# EAGLE board Placa_intermediária (EAGLE 9.5.1)
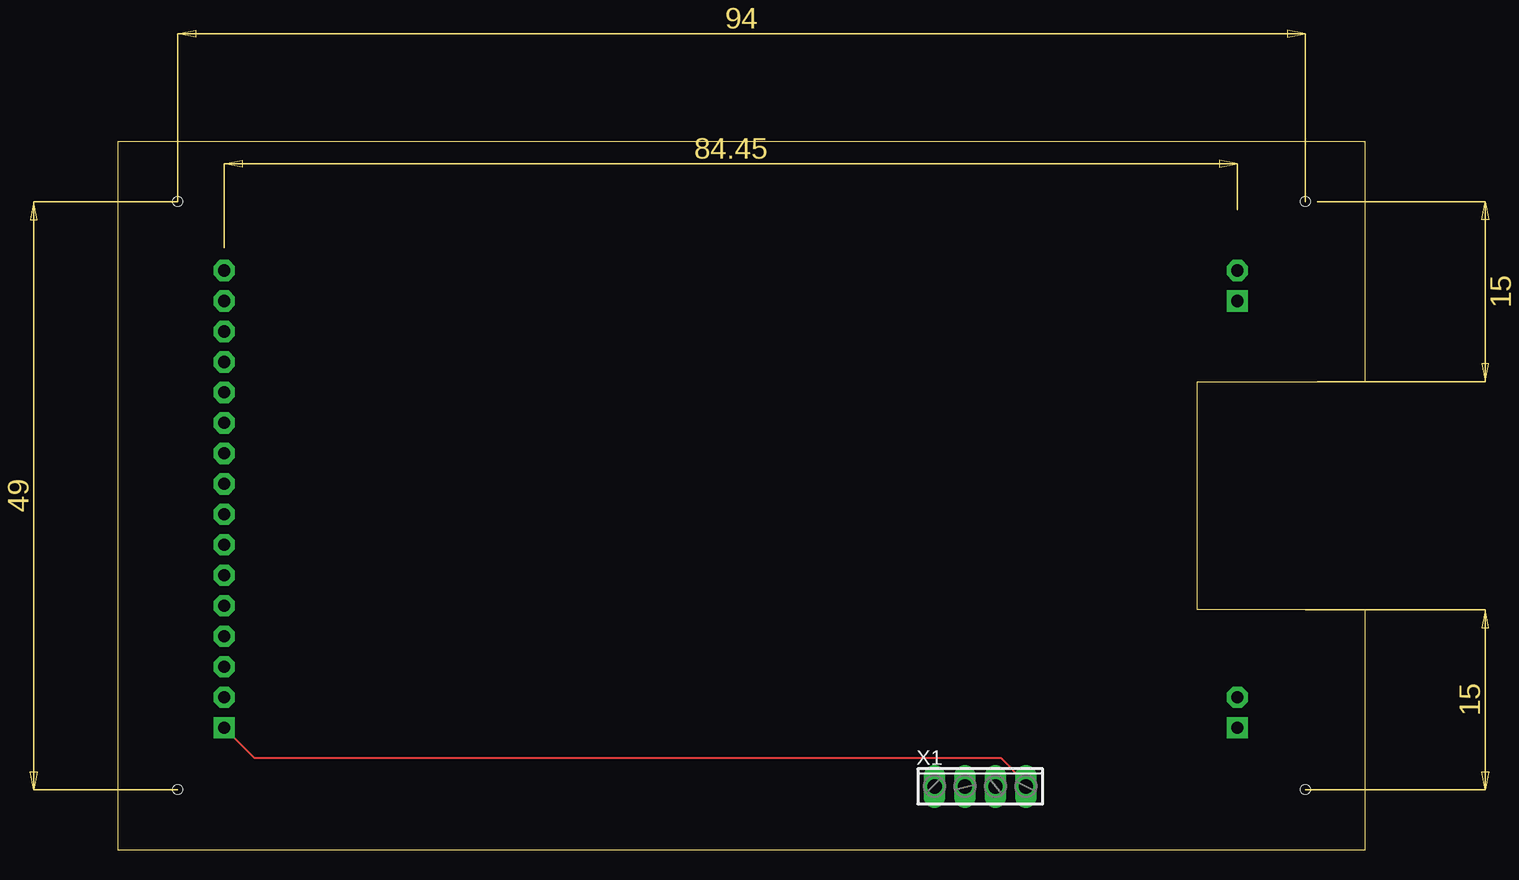
[diagram p0: board, top side]
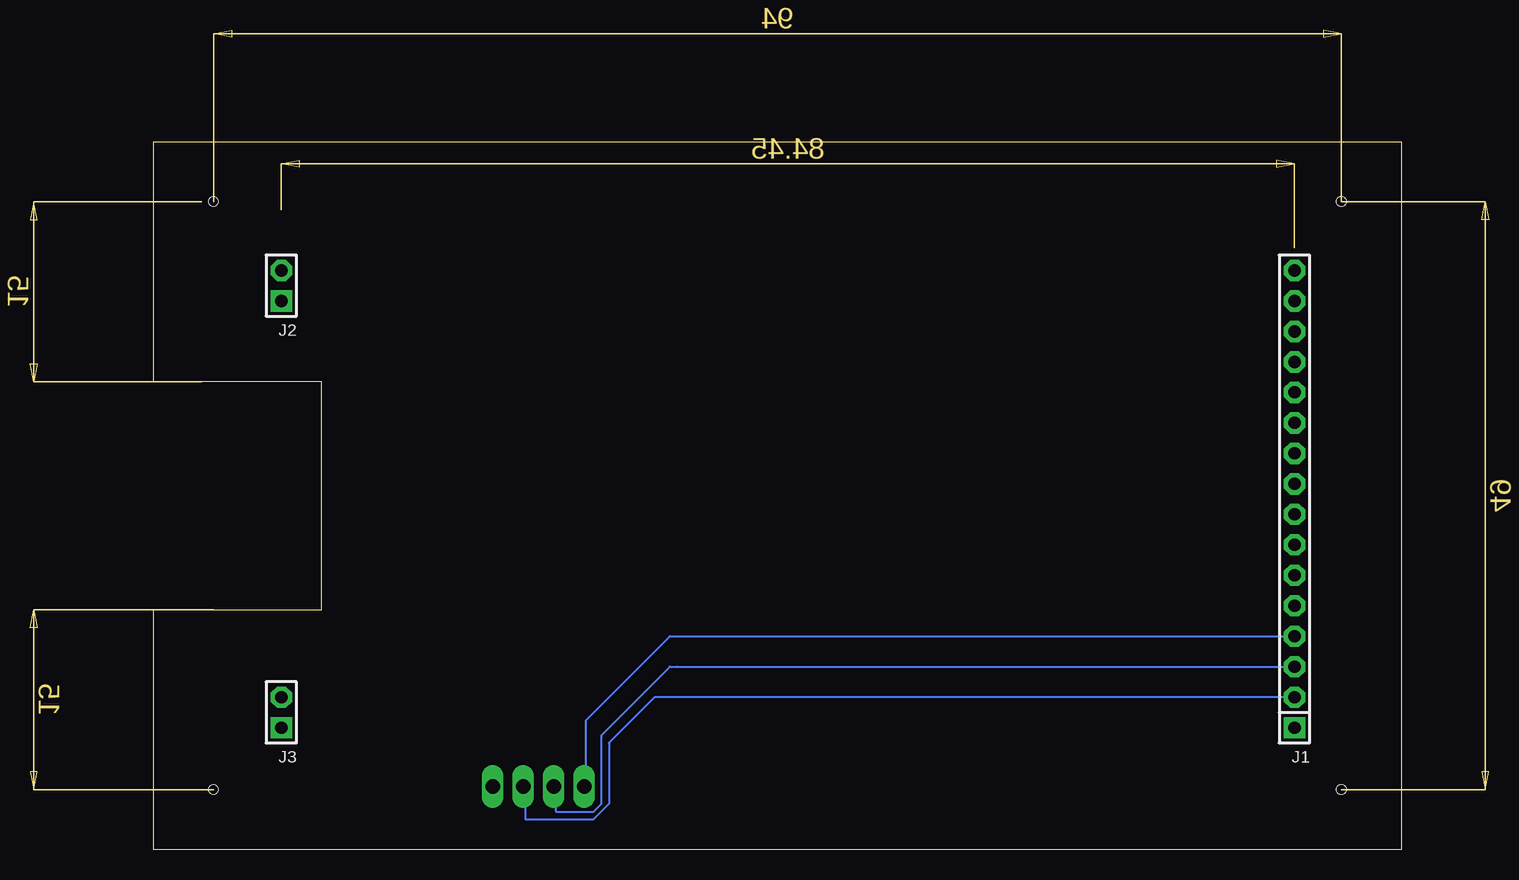
[diagram p1: board, bottom side, seen from below]

Size 104 x 59 mm. Coordinates in mm from the lower left corner, seen from the top.
Outline: 0,0 104,0 104,20 90,20 90,39 104,39 104,59 0,59 0,0
Copper layers (1*16): Top 0.035mm / dielectric 1.5mm / Bottom 0.035mm
Design rules "default": minimum track width 6mil, minimum drill 0.35mm, track to track 6mil, track to pad 6mil, pad to pad 6mil, via to via 6mil, smd to smd 6mil, copper to edge 40mil, drill to drill 6mil, minimum pad ring 10mil, minimum via ring 8mil, stop-mask expansion 4mil, vias tented up to drill 0mil, thermal gap 10mil
Holes 0.8 mm at 5,54 5,5 99,54 99,5

## Footprints (pad centres in the part's own frame; a part is rotated, then mirrored left to right if it is on the bottom)
SIP-100-16-40 = drill 1.016 pad 1.778 square: 1 -19.05,0 | drill 1.016 pad 1.778 octagon: 2 -16.51,0; 3 -13.97,0; 4 -11.43,0; 5 -8.89,0; 6 -6.35,0; 7 -3.81,0; 8 -1.27,0; 9 1.27,0; 10 3.81,0; 11 6.35,0; 12 8.89,0; 13 11.43,0; 14 13.97,0; 15 16.51,0; 16 19.05,0
SIP-100-02-40 = drill 1.016 pad 1.778 square: 1 -1.27,0 | drill 1.016 pad 1.778 octagon: 2 1.27,0
4POL254 = drill 1.2 long: 1 -3.81,0; 2 -1.27,0; 3 1.27,0; 4 3.81,0

## Placement (x,y rotation side)
J1  F-1X16-SIP-100-40  [SIP-100-16-40]  8.89,29.21 90 bottom
J2  F-1X02-SIP-100-40  [SIP-100-02-40]  93.34,46.99 90 bottom
J3  F-1X02-SIP-100-40  [SIP-100-02-40]  93.34,11.43 90 bottom
X1  [4POL254]  71.91,5.27 0 top

## Library data of the parts
J1-J3 = con-headers-jp(1)
X1 = con-phoenix-254; OC_FARNELL: unknown; OC_NEWARK: unknown

## Nets
5V: J1.4 X1.1
GND: J1.1 X1.4
SCREEN_RX: J1.2 X1.3
SCREEN_TX: J1.3 X1.2

## Tracks (layer width: path | path; a pad name or v marks a point on that pad's centre or on a via)
5V
  Bottom 0.152: X1.1 67.94,5.71 67.94,10.79 60.96,17.78 J1.4
GND
  Top 0.152: J1.1 11.43,7.62 73.66,7.62 75.56,5.71 X1.4
SCREEN_RX
  Bottom 0.152: X1.3 73.03,5.08 73.03,2.54 67.31,2.54 66.04,3.81 66.04,8.89 62.23,12.7 J1.2
SCREEN_TX
  Bottom 0.152: X1.2 70.48,5.08 70.48,3.17 67.31,3.17 66.67,3.81 66.67,9.53 60.96,15.24 60.33,15.24 J1.3